# Altium PCB XJTLU_Torpedo.PcbDoc
Units mm, origin at the board's own origin, x right, y up, seen from the top; angles counter-clockwise.
Board outline 24 x 24 mm, 2 copper layers (Top Layer, Bottom Layer); 6 components, 5 nets, 14 pads, 6 vias.
Unrouted connection lines stored in the file: 3.
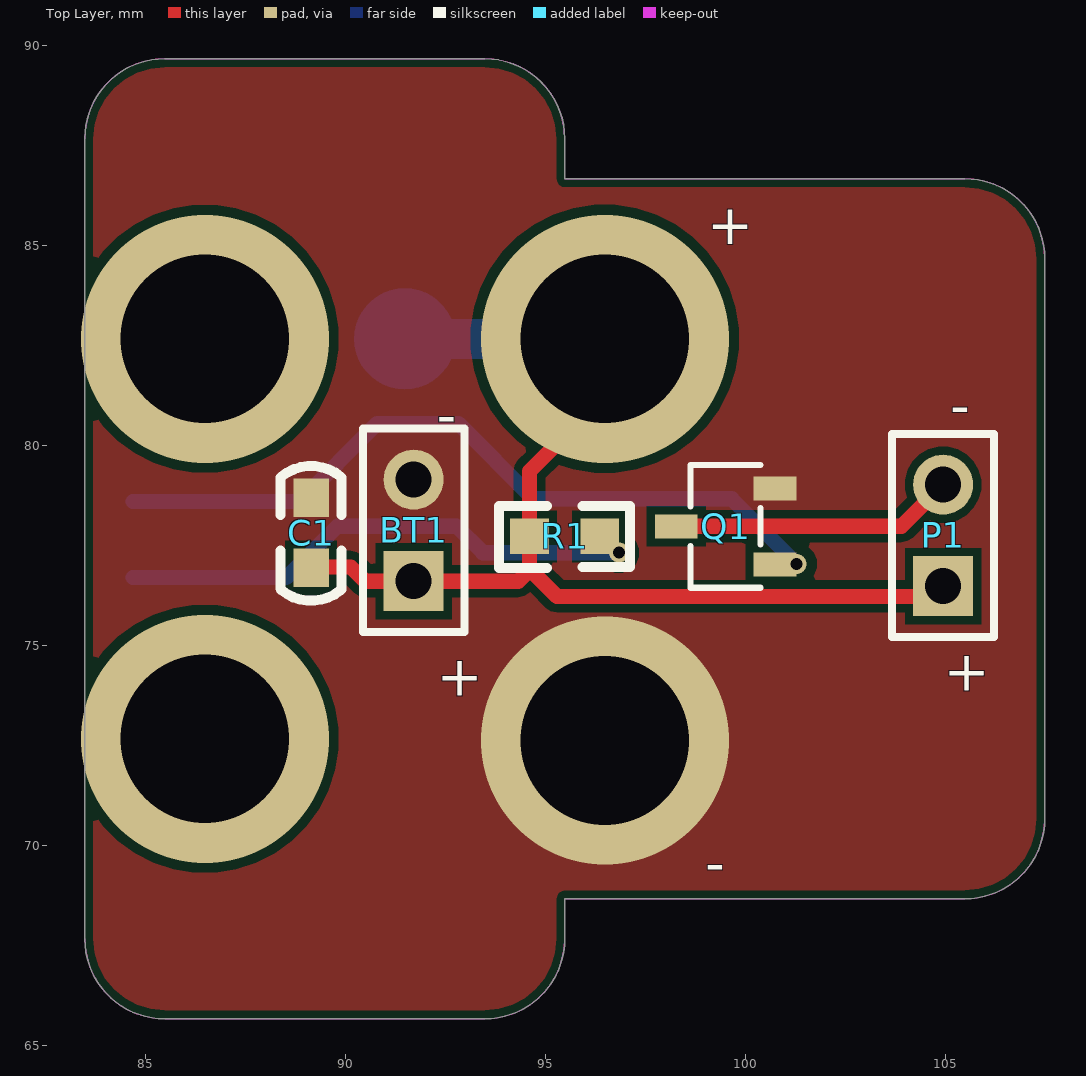
[diagram p0: Top Layer view]
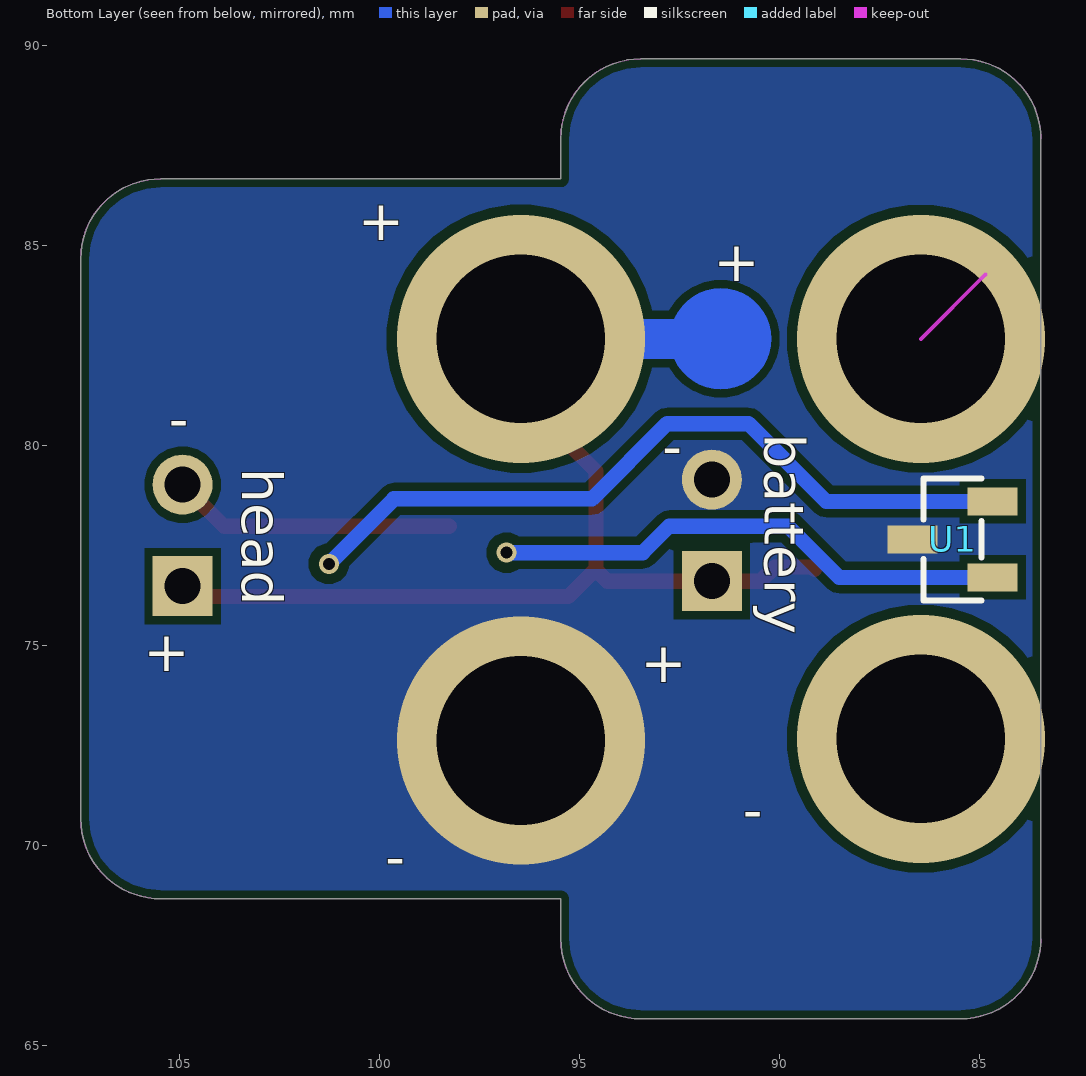
[diagram p1: Bottom Layer view, seen from below]

## Layer stack, top to bottom
Top Solder: solder mask 0.0102, Solder Resist, Dk 3.5
Top Layer: signal copper 0.0356
Dielectric 1: dielectric 0.32, FR-4, Dk 4.8
Bottom Layer: signal copper 0.0356
Bottom Solder: solder mask 0.0102, Solder Resist, Dk 3.5

## Board outline
83.471,67.665 ccw(c85.471,67.665) 85.471,65.665 93.471,65.665 ccw(c93.471,67.665) 95.471,67.665 95.471,68.665 105.471,68.665 ccw(c105.471,70.665) 107.471,70.665 107.471,84.665 ccw(c105.471,84.665) 105.471,86.665 95.471,86.665 95.471,87.665 ccw(c93.471,87.665) 93.471,89.665 85.471,89.665 ccw(c85.471,87.665) 83.471,87.665

## Design rules (kind name [scope] priority, off if disabled: settings)
Clearance [(InNetClass('All Nets'))] p1: gap=0.2 ignorepadtopadclearanceinfootprint=FALSE except(0.25: Via-Fill Via-Poly Via-Region)
ComponentClearance [All] p1: gap=0.22 collisioncheckmode=3 verticalgap=0.22 showdistances=FALSE
MinimumSolderMaskSliver [All] p1: minsoldermaskwidth=0
PolygonConnect [All] p1: connectstyle=Direct reliefconductorwidth=0.254 reliefentries=4 polygonreliefangle="90 Angle" airgapwidth=0.254
RoutingVias [All] p1: holewidth=0.2 width=0.4 viastyle="Through Hole" minholewidth=0.2 minwidth=0.4 maxholewidth=5 maxwidth=5
SilkToSilkClearance [All] p1: silktosilkclearance=0.1
SilkToSolderMaskClearance [IsPad] p1: minsilkscreentomaskgap=0.1 clearancetoexposedcopper=TRUE
SolderMaskExpansion [All] p1: expansion=0.102 istentingtop=FALSE
Width [All] p1: maxlimit=2.54 minlimit=0.127 preferedwidth=0.381 minimp=50.000000 maximp=50.000000 favimp=50.000000
26 further rules are at their usual default settings.

## Components (designator, comment, footprint, x,y, rotation, side; value= is the part's Value field where it differs from the comment)
BT1 "Battery" BAT-2 91.694,77.876 r90 top
C1 "Cap" C0603 89.129,78.689 r270 top value=470pF
P1 "飞镖头" BAT-2 104.927,77.749 r90 top
Q1 "AP2302B" SOT-23-3 99.492,77.978 r0 top
R1 "Res1" R0603 94.59,77.724 r0 top value=22R
U1 "CC6201" TSOT-23-3 85.674,77.648 r180 bottom

## Footprints (in the part's own frame and the unit in brackets; to place one, negate y for a bottom-side part, rotate by r counter-clockwise, add the part's x,y. Pads: shape width x height; smd on the part's side, far side on the other; paste and mask are expansions set on the pad)
BAT-2 [mm] "Battery; 2 Leads"
  rect 1.5x1.5 hole 0.9: 1(-1.27,0)
  round 1.5 hole 0.9: 2(1.27,0)
  silkscreen extent -2.54,-1.27 2.54,1.27
C0603 [mil]
  rect 38x35 smd: 1(0,0) 2(69,0)
  silkscreen extent -31,-30 101,30, body extent 4,-16 67,16, height 12
R0603 [mil] "1/10W"
  rect 38x35 smd: 1(0,0) 2(69,0)
  silkscreen extent -30,-31 99,30, body extent 4,-16 66,16, height 18
SOT-23-3 [mm]
  rect 1.07x0.6 smd: 1(1.235,-0.95) 2(1.235,0.95) 3(-1.235,0)
  silkscreen extent -0.88,-1.54 0.88,1.54, body extent -1.4,-1.52 1.4,1.52, height 1.1
TSOT-23-3 [mm] "霍尔效应开关"
  rect 1.25x0.7 smd: 1(1,-0.95) 2(1,0.95) 3(-1,0)
  silkscreen extent -0.73,-1.53 0.73,1.53, body extent -1.02,-1.52 1.02,1.52, height 1.3

## Part data
BT1: "Multicell Battery", LatestRevisionDate=17-Jul-2002, LatestRevisionNote="Re-released for DXP Platform.", PackageDescription="Battery; 2 Leads", PackageReference=BAT-2, Published=24-Mar-1999, Publisher="Altium Limited"
C1: "Capacitor", LatestRevisionDate=17-Jul-2002, LatestRevisionNote="Re-released for DXP Platform.", PackageDescription="Radial Cap, Thru-Hole; 2 Leads; 0.3 in Pin Spacing", PackageReference=RAD-0.3, Published=8-Jun-2000, Publisher="Altium Limited"
P1: library part "Header 2", "Header, 2-Pin", LatestRevisionDate=17-Jul-2002, LatestRevisionNote="Re-released for DXP Platform.", Publisher="Altium Limited"
Q1: library part AP2302BI, "20V N-Channel Enhancement Mode MOSFET"
R1: "Resistor", LatestRevisionDate=17-Jul-2002, LatestRevisionNote="Re-released for DXP Platform.", PackageDescription="Axial Device, Thru-Hole; 2 Leads; 0.3 in Pin Spacing", PackageReference=AXIAL-0.3, Published=8-Jun-2000, Publisher="Altium Limited"
U1: library part "Header 3", "Header, 3-Pin", LatestRevisionDate=17-Jul-2002, LatestRevisionNote="Re-released for DXP Platform.", Publisher="Altium Limited"

## Via types
v1: diameter 6.2, hole 4.22, Top Layer to Bottom Layer, 4 vias
v2: diameter 0.5, hole 0.3, Top Layer to Bottom Layer, 2 vias

## Nets (pads, with @x,y where several pads share a name; then routed paths per layer and width w, separated by ;. In a path a pad name is that pad's centre, name@x,y a point inside that pad or via, vN(x,y) a via of type N, cw(c..) or ccw(c..) an arc to the next point about the centre after c; other vN are vias at no path point)
GND: BT1.2 C1.1 Q1.2 U1.3
  other v1: 96.471,72.622
NetP1_2: P1.2 Q1.3 | length 7.1
  Top Layer w0.381: Q1.3 103.886,77.978 P1.2
VCC: BT1.1 C1.2 P1.1 R1.1 | length 28
  Top Layer w0.381: C1.2@89.129,76.898 89.192,76.962 90.119,76.962 90.475,76.606 94.31,76.606 94.59,76.886 94.59,79.354 96.471,81.235 v1(96.471,82.665) ; 94.59,76.911 95.275,76.225 104.673,76.225 P1.1
  Bottom Layer w0.381: 91.491,82.702 91.528,82.665
  Bottom Layer w1: 91.528,82.665 v1(96.471,82.665)
VDD: R1.2 U1.1 | length 12.9
  Bottom Layer w0.381: U1.1 88.509,76.698 89.789,77.978 92.761,77.978 93.421,77.318 v2@96.793,77.318
  other v2: 96.825,77.318
VOUT: Q1.1 U1.2 | length 18.9
  Bottom Layer w0.381: U1.2 88.834,78.598 90.78,80.543 92.812,80.543 94.691,78.664 99.644,78.664 v2(101.27,77.038)
copper on no net:
  other v1: 86.471,72.665 86.471,82.665

## Polygon pours and split planes (outlines as drawn)
GND on Bottom Layer "GND_L02_P001" (solid, remove dead copper, pour order 1): 80.467,91.389 80.467,61.722 110.795,61.722 110.795,91.389
GND on Top Layer "GND_L01_P000" (solid, remove dead copper, pour order 0): 80.188,92.024 80.188,63.551 112.243,63.551 112.243,92.024

## Keep-outs
Bottom Layer:
  lines w0.1: 84.859,84.277 86.471,82.665
Keep-Out Layer:
  the board outline again, w0.013

## Other copper
Bottom Layer:
  region net VCC: 90.211,82.665 ccw(c91.471,82.665) 91.471,81.405 ccw(c91.471,82.665) 92.731,82.665 ccw(c91.471,82.665) 91.471,83.925 ccw(c91.471,82.665)

## Silkscreen, mask and mechanical layers (free items; w line width, h text height)
Top Overlay:
  text "+" at 99.032,85.023 h1
  text "-" at 105.103,80.498 h1
  text "-" at 92.276,80.27 h1
  text "+" at 104.95,73.872 h1
  text "+" at 92.276,73.745 h1
  text "-" at 98.981,69.068 h1
Bottom Overlay:
  text "+" at 99.388,85.124 h1
  text "+" at 90.498,84.108 h1
  text "battery" at 90.373,80.292 h1 r90
  text "-" at 104.773,80.168 h1
  text "-" at 92.428,79.482 h1
  text "head" at 103.431,79.428 h1 r90
  text "+" at 104.747,74.355 h1
  text "+" at 92.327,74.075 h1
  text "-" at 90.422,70.389 h1
  text "-" at 99.362,69.221 h1
Bottom Solder:
  circle w0.1: c91.471,82.665 r1.26
  circle w0.1: c91.471,72.665 r1.26
  region: 90.211,72.665 ccw(c91.471,72.665) 91.471,71.405 ccw(c91.471,72.665) 92.731,72.665 ccw(c91.471,72.665) 91.471,73.925 ccw(c91.471,72.665)
  region: 90.211,82.665 ccw(c91.471,82.665) 91.471,81.405 ccw(c91.471,82.665) 92.731,82.665 ccw(c91.471,82.665) 91.471,83.925 ccw(c91.471,82.665)
Mechanical 1:
  circle w0.1: c91.471,72.665 r1.26
  circle w0.1: c91.471,82.665 r1.26